# EAGLE board powerSupply (EAGLE 9.5.2)
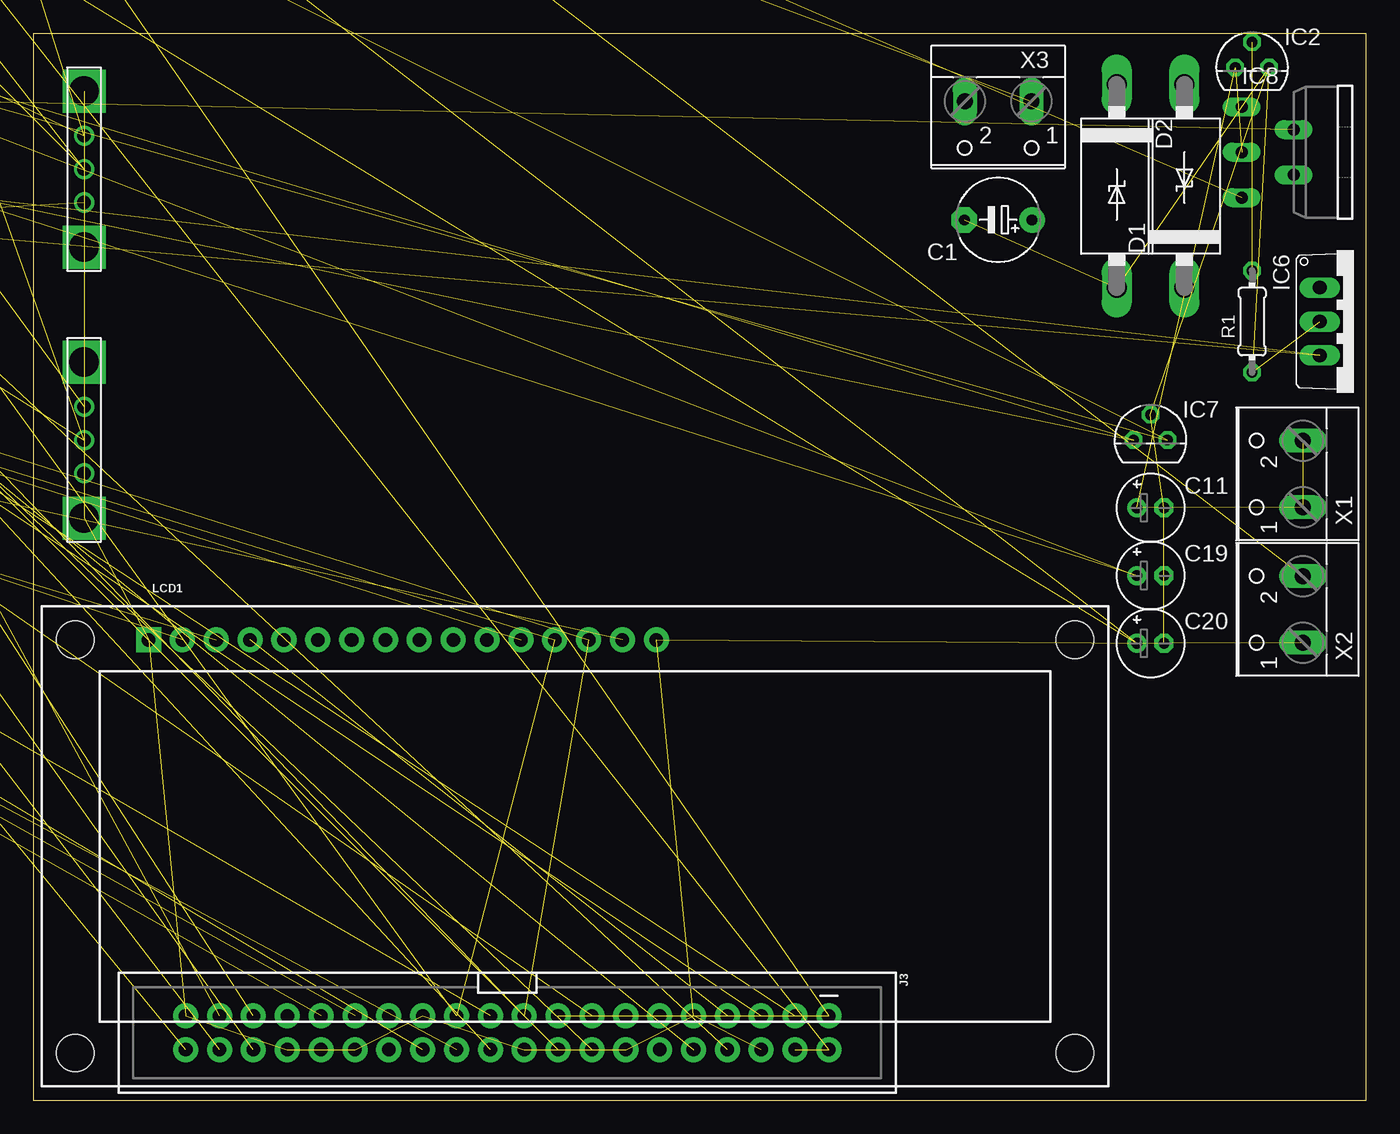
[diagram p0: board, top side]
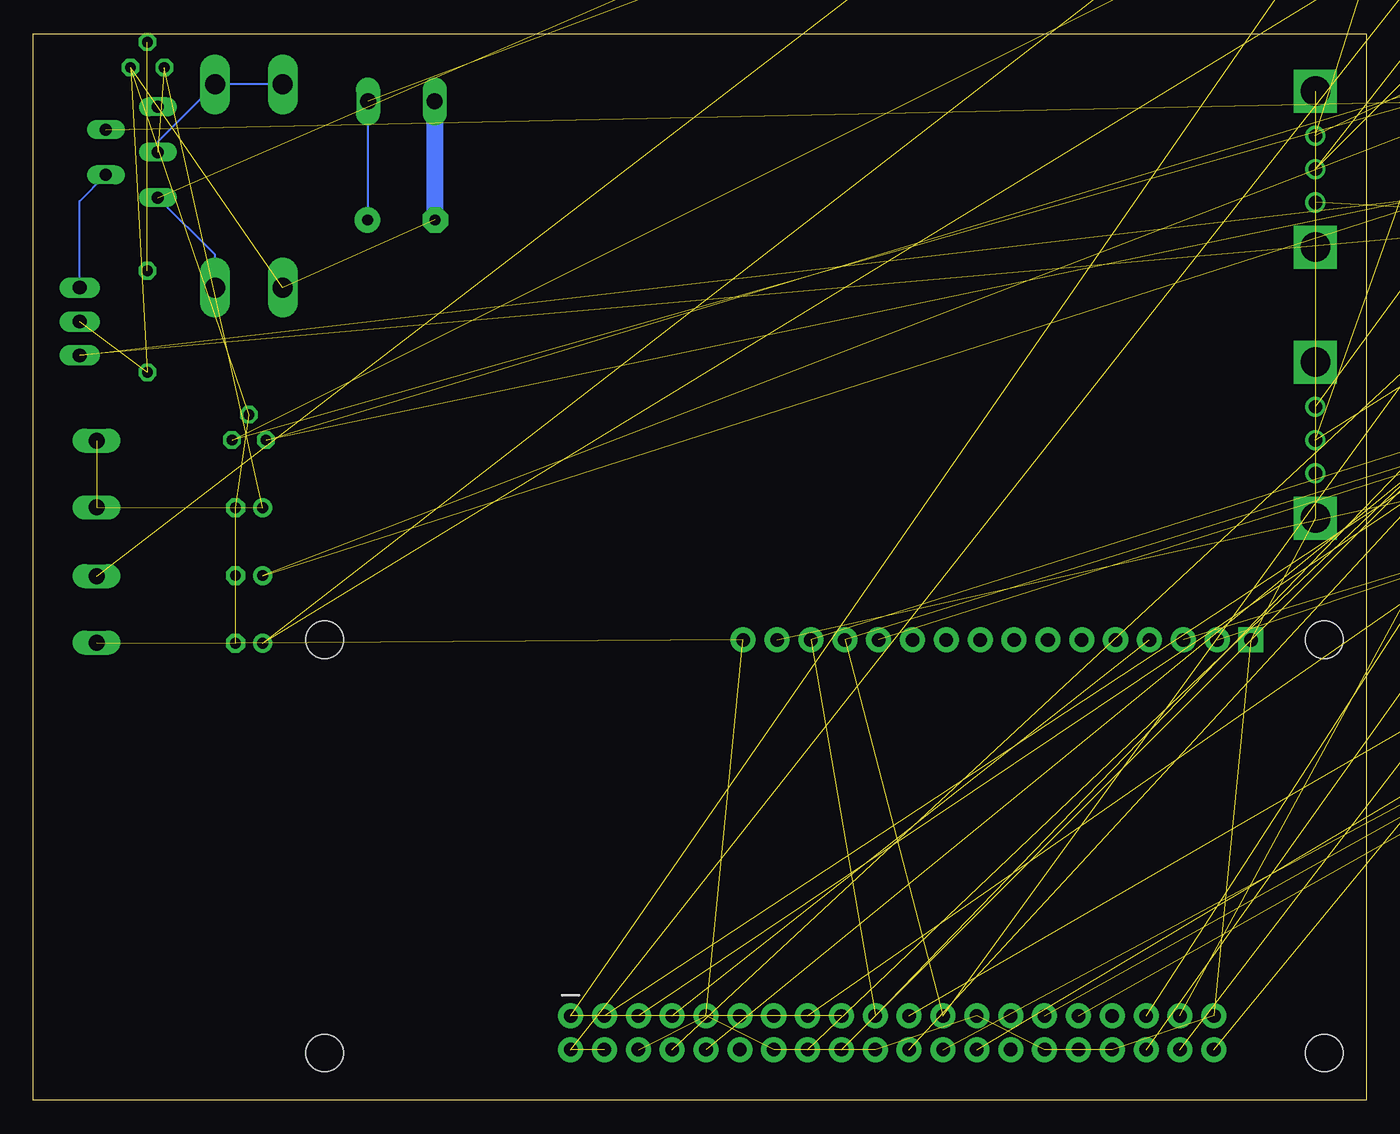
[diagram p1: board, bottom side, seen from below]

Size 100 x 80 mm. Coordinates in mm from the lower left corner, seen from the top.
Outline: 0,0 100,0 100,80 0,80 0,0
Copper layers (1*16): Top 0.035mm / dielectric 1.5mm / Bottom 0.035mm
Design rules "default": minimum track width 6mil, minimum drill 0.35mm, track to track 6mil, track to pad 6mil, pad to pad 6mil, via to via 6mil, smd to smd 6mil, copper to edge 40mil, drill to drill 6mil, minimum pad ring 10mil, minimum via ring 8mil, stop-mask expansion 4mil, vias tented up to drill 0mil, thermal gap 10mil

## Footprints (pad centres in the part's own frame; a part is rotated, then mirrored left to right if it is on the bottom)
E5-6 = drill 0.813 pad 1.905: + -2.54,0 | drill 0.813 pad 1.905 octagon: - 2.54,0
C050-024X044 = drill 0.813 octagon: 1 -2.54,0; 2 2.54,0
E2-5 = drill 0.813 pad 1.422: + -1.016,0 | drill 0.813 pad 1.422 octagon: - 1.016,0
C4111-15 = drill 1.499 long: A 7.62,0; C -7.62,0
DIL16 = drill 0.813 long: 1 -8.89,-3.81; 2 -6.35,-3.81; 3 -3.81,-3.81; 4 -1.27,-3.81; 5 1.27,-3.81; 6 3.81,-3.81; 7 6.35,-3.81; 8 8.89,-3.81; 9 8.89,3.81; 10 6.35,3.81; 11 3.81,3.81; 12 1.27,3.81; 13 -1.27,3.81; 14 -3.81,3.81; 15 -6.35,3.81; 16 -8.89,3.81
TO92 = drill 0.813 octagon: 1 -1.27,0; 2 0,1.905; 3 1.27,0
DIP08 = drill 0.813 pad 1.626 square: 1 -3.81,-3.81 | drill 0.813 pad 1.626: 2 -1.27,-3.81; 3 1.27,-3.81; 4 3.81,-3.81; 5 3.81,3.81; 6 1.27,3.81; 7 -1.27,3.81; 8 -3.81,3.81
SO16 = smd 0.66 x 2.032: 1 -4.445,-3.073; 2 -3.175,-3.073; 3 -1.905,-3.073; 4 -0.635,-3.073; 5 0.635,-3.073; 6 1.905,-3.073; 7 3.175,-3.073; 8 4.445,-3.073; 9 4.445,3.073; 10 3.175,3.073; 11 1.905,3.073; 12 0.635,3.073; 13 -0.635,3.073; 14 -1.905,3.073; 15 -3.175,3.073; 16 -4.445,3.073
TO220V = drill 1.016 long: 1 -2.54,-2.54; 2 0,-2.54; 3 2.54,-2.54
TO220-5 = drill 0.9 long: 1 -3.4,-8.4; 2 -1.7,-4.5; 3 0,-8.4; 4 1.7,-4.5; 5 3.4,-8.4
DIP08' = drill 0.813 pad 1.626: 1 -3.81,-3.81; 2 -1.27,-3.81; 3 1.27,-3.81; 4 3.81,-3.81; 5 3.81,3.81; 6 1.27,3.81; 7 -1.27,3.81; 8 -3.81,3.81
SOT23-8 = smd 0.4 x 1.2: 1 -0.975,-1.3; 2 -0.325,-1.3; 3 0.325,-1.3; 4 0.975,-1.3; 5 0.975,1.3; 6 0.325,1.3; 7 -0.325,1.3; 8 -0.975,1.3
2X20_SHROUDED = drill 1.016 pad 1.88: 1 -1.27,24.13; 2 1.27,24.13; 3 -1.27,21.59; 4 1.27,21.59; 5 -1.27,19.05; 6 1.27,19.05; 7 -1.27,16.51; 8 1.27,16.51; 9 -1.27,13.97; 10 1.27,13.97; 11 -1.27,11.43; 12 1.27,11.43; 13 -1.27,8.89; 14 1.27,8.89; 15 -1.27,6.35; 16 1.27,6.35; 17 -1.27,3.81; 18 1.27,3.81; 19 -1.27,1.27; 20 1.27,1.27; 21 -1.27,-1.27; 22 1.27,-1.27; 23 -1.27,-3.81; 24 1.27,-3.81; 25 -1.27,-6.35; 26 1.27,-6.35; 27 -1.27,-8.89; 28 1.27,-8.89; 29 -1.27,-11.43; 30 1.27,-11.43; 31 -1.27,-13.97; 32 1.27,-13.97; 33 -1.27,-16.51; 34 1.27,-16.51; 35 -1.27,-19.05; 36 1.27,-19.05; 37 -1.27,-21.59; 38 1.27,-21.59; 39 -1.27,-24.13; 40 1.27,-24.13
1X03 = drill 1.016: 1 -2.54,0; 2 0,0; 3 2.54,0
1X05 = drill 1.016 long: 1 -5.08,0; 2 -2.54,0; 3 0,0; 4 2.54,0; 5 5.08,0
LCD-16X2 = drill 1.016 pad 1.88 square: 1 -32,15.5 | drill 1.016 pad 1.88: 2 -29.46,15.5; 3 -26.92,15.5; 4 -24.38,15.5; 5 -21.84,15.5; 6 -19.3,15.5; 7 -16.76,15.5; 8 -14.22,15.5; 9 -11.68,15.5; 10 -9.14,15.5; 11 -6.6,15.5; 12 -4.06,15.5; 13 -1.52,15.5; 14 1.02,15.5; 15 3.56,15.5; 16 6.1,15.5 | hole 2.8: -37.5,15.5; -37.5,-15.5; 37.5,15.5; 37.5,-15.5
0204/7 = drill 0.813 octagon: 1 -3.81,0; 2 3.81,0
0207/12 = drill 0.813 pad 1.676 octagon: 1 -6.35,0; 2 6.35,0
RTRIM64W = drill 0.61: 1 1.27,-2.54; 2 1.27,0; 3 1.27,2.54
APLS_EC11B_SW = drill 2.2 square: GND@4 5.85,0; GND@5 -5.85,0 | drill 1: P$1 0,0; P$2 2.5,0; P$3 -2.5,0
B3F-1000 = drill 1 pad 1.6: 1 -3.25,2.25; 2 3.25,2.25; 3 -3.25,-2.25; 4 3.25,-2.25
TO92' = drill 0.813 octagon: 1 1.27,0; 2 0,1.905; 3 -1.27,0
W237-102 = drill 1.194 long: 1 -2.5,-1.27; 2 2.5,-1.27

## Placement (x,y rotation side)
C1  220u 25V  [E5-6]  72.39,66.04 180 top
C2  100n  [C050-024X044]  -72.39,88.9 0 top  (outside the outline)
C3  100n  [C050-024X044]  -80.01,88.9 0 top  (outside the outline)
C4  100n  [C050-024X044]  -87.63,88.9 0 top  (outside the outline)
C5  2u2  [E2-5]  -36.83,102.87 0 top  (outside the outline)
C6  2u2  [E2-5]  -45.72,102.87 0 top  (outside the outline)
C7  100n  [C050-024X044]  -95.25,88.9 0 top  (outside the outline)
C8  100n  [C050-024X044]  -102.87,88.9 0 top  (outside the outline)
C9  100n  [C050-024X044]  -110.49,88.9 0 top  (outside the outline)
C10  100n  [C050-024X044]  -16.51,96.52 0 top  (outside the outline)
C11  2u2  [E2-5]  83.82,44.45 0 top
C12  100n  [C050-024X044]  -24.13,96.52 0 top  (outside the outline)
C13  100n  [C050-024X044]  -31.75,96.52 0 top  (outside the outline)
C14  10n  [C050-024X044]  -39.37,96.52 0 top  (outside the outline)
C15  10n  [C050-024X044]  -46.99,96.52 0 top  (outside the outline)
C16  10n  [C050-024X044]  -54.61,96.52 0 top  (outside the outline)
C17  10n  [C050-024X044]  -62.23,96.52 0 top  (outside the outline)
C18  2u2  [E2-5]  -102.87,95.25 0 top  (outside the outline)
C19  2u2  [E2-5]  83.82,39.37 0 top
C20  2u2  [E2-5]  83.82,34.29 0 top
C21  100n  [C050-024X044]  -69.85,96.52 0 top  (outside the outline)
C22  100n  [C050-024X044]  -77.47,96.52 0 top  (outside the outline)
C23  100n  [C050-024X044]  -85.09,96.52 0 top  (outside the outline)
C24  100n  [C050-024X044]  -92.71,96.52 0 top  (outside the outline)
D1  1N5821  [C4111-15]  86.36,68.58 90 top
D2  1N5821  [C4111-15]  81.28,68.58 270 top
IC1  MCP3008  [DIL16]  -81.28,68.58 0 top  (outside the outline)
IC2  LM334Z  [TO92]  91.44,77.47 0 top
IC3  MCP4821P  [DIP08]  -20.32,80.01 0 top  (outside the outline)
IC4  MCP4821P  [DIP08]  -34.29,80.01 0 top  (outside the outline)
IC5  74LS139D  [SO16]  -100.33,80.01 0 top  (outside the outline)
IC6  7805TV  [TO220V]  99.06,58.42 270 top
IC7  LP2950Z  [TO92]  83.82,49.53 0 top
IC8  LT3080T  [TO220-5]  99.06,71.12 270 top
IC9  LM358  [DIP08']  -48.26,80.01 0 top  (outside the outline)
IC11  [SOT23-8]  -109.22,114.3 0 top  (outside the outline)
IC12  LM358  [DIP08']  -62.23,80.01 0 top  (outside the outline)
J3  RASPBERRYPI-40-PIN-GPIO_PTH  [2X20_SHROUDED]  35.56,5.08 270 top
JP1  [1X03]  -95.25,101.6 0 top  (outside the outline)
JP2  [1X05]  -55.88,101.6 0 top  (outside the outline)
LCD1  LCD-16X2SILK  [LCD-16X2]  40.64,19.05 0 top
R1  100R  [0204/7]  91.44,58.42 90 top
R2  10R  [0207/12]  -33.02,107.95 0 top  (outside the outline)
R3  10R  [0207/12]  -48.26,107.95 0 top  (outside the outline)
R4  10R  [0207/12]  -63.5,107.95 0 top  (outside the outline)
R5  10R  [0207/12]  -78.74,107.95 0 top  (outside the outline)
R6  10R  [0207/12]  -93.98,107.95 0 top  (outside the outline)
R7  10R  [0207/12]  -109.22,107.95 0 top  (outside the outline)
R8  10R  [0207/12]  -20.32,113.03 0 top  (outside the outline)
R9  10R  [0207/12]  -35.56,113.03 0 top  (outside the outline)
R10  10R  [0207/12]  -50.8,113.03 0 top  (outside the outline)
R11  10R  [0207/12]  -66.04,113.03 0 top  (outside the outline)
R12  18K 0.1%  [0204/7]  -44.45,118.11 0 top  (outside the outline)
R13  18K 0.1%  [0204/7]  -54.61,118.11 0 top  (outside the outline)
R14  18K 0.1%  [0204/7]  -64.77,118.11 0 top  (outside the outline)
R15  18K 0.1%  [0204/7]  -74.93,118.11 0 top  (outside the outline)
R16  1K  [0204/7]  -38.1,123.19 0 top  (outside the outline)
R17  1K  [0204/7]  -48.26,123.19 0 top  (outside the outline)
R18  1K 0.1%  [0204/7]  -58.42,123.19 0 top  (outside the outline)
R19  18K 0.1%  [0204/7]  -85.09,118.11 0 top  (outside the outline)
R20  18K 0.1%  [0204/7]  -95.25,118.11 0 top  (outside the outline)
R21  100R  [0204/7]  -68.58,123.19 0 top  (outside the outline)
R22  10K  [0204/7]  -78.74,123.19 0 top  (outside the outline)
R23  10R  [0207/12]  -81.28,113.03 0 top  (outside the outline)
R25  1K 0.1%  [0204/7]  -88.9,123.19 0 top  (outside the outline)
R26  18K 0.1%  [0204/7]  -105.41,118.11 0 top  (outside the outline)
R27  18K 0.1%  [0204/7]  -17.78,123.19 0 top  (outside the outline)
R28  10K  [0204/7]  -99.06,123.19 0 top  (outside the outline)
R29  10K  [0204/7]  -109.22,123.19 0 top  (outside the outline)
R30  10K  [0204/7]  -17.78,128.27 0 top  (outside the outline)
R31  10K  [0204/7]  -27.94,128.27 0 top  (outside the outline)
R32  10R  [0207/12]  -96.52,113.03 0 top  (outside the outline)
R33  10K  [RTRIM64W]  -99.06,68.58 0 top  (outside the outline)
R34  10K  [0204/7]  -38.1,128.27 0 top  (outside the outline)
R35  10K  [0204/7]  -48.26,128.27 0 top  (outside the outline)
R36  10K  [0204/7]  -58.42,128.27 0 top  (outside the outline)
R37  10K  [0204/7]  -68.58,128.27 0 top  (outside the outline)
R38  10K  [0204/7]  -78.74,128.27 0 top  (outside the outline)
R39  10K  [0204/7]  -88.9,128.27 0 top  (outside the outline)
R40  1K  [0204/7]  -99.06,128.27 0 top  (outside the outline)
R41  1M  [RTRIM64W]  -109.22,68.58 0 top  (outside the outline)
R42  2M  [0204/7]  -109.22,128.27 0 top  (outside the outline)
R43  4M  [0204/7]  -17.78,133.35 0 top  (outside the outline)
R44  Don't populate  [0204/7]  -21.59,118.11 0 top  (outside the outline)
R45  Don't populate  [0204/7]  -34.29,118.11 0 top  (outside the outline)
SW1  EC11B_SW  [APLS_EC11B_SW]  3.81,49.53 90 top
SW2  EC11B_SW  [APLS_EC11B_SW]  3.81,69.85 90 top
SW7  B3F-1000  [B3F-1000]  -17.78,68.58 0 top  (outside the outline)
T1  2N3904  [TO92']  -110.49,101.6 0 top  (outside the outline)
T3  2N3904  [TO92']  -22.86,107.95 0 top  (outside the outline)
U1  MAX874CPA  [DIP08]  -76.2,80.01 0 top  (outside the outline)
X1  VOUT  [W237-102]  93.98,46.99 90 top
X2  VSENSE  [W237-102]  93.98,36.83 90 top
X3  VIN  [W237-102]  72.39,73.66 180 top

## Library data of the parts
C1 = rcl; SPICEPREFIX: C
C2-C24 IC1 JP1 R2-R11 R23 R32 = adafruit
D1 D2 = diode
IC2 IC6 IC7 = linear
IC3 IC4 = mixedSignal
IC5 = 74xx-us
IC8 = LinearRegulators
IC9 IC12 = SparkFun-IC-Amplifiers; PROD_ID: IC-09172
IC11 U1 = Hexellence-mixedSignal
J3 = Hexellence-Connectors; PROD_ID: CONN-12263; SF_ID: PRT-13054
JP2 = pinhead
LCD1 = Hexellence-Displays; PROD_ID: LCD-12633; SF_ID: LCD-00255
R1 R12-R22 R25-R31 R34-R40 R42-R45 = rcl; SPICEPREFIX: R
R33 R41 = resistor
SW1 SW2 = Hexellence-Switch
SW7 = Switch; CREATED_BY: PCBLayout.com; DIGI_KEY_PART_NUMBER: SW400-ND; MANUFACTURER: Omron Electronics Inc-EMC Div; MPN: B3F-1000; PACKAGE: SPST-NO
T1 T3 = transistor
X1-X3 = con-wago-500; MPN: 237-102; OC_FARNELL: unknown; OC_NEWARK: 70K9898

## Nets
0.064V@25C: IC2.2 R1.2
3.3V: C8.1 C9.1 C10.1 C20.+ C21.1 IC1.3 IC3.1 IC3.6 IC4.1 IC4.6 IC7.1 R44.1
4.096V: IC1.15 R42.1 U1.6
5V: C2.1 C12.1 C19.+ C22.1 C24.1 IC1.16 IC6.3 IC7.3 IC11.4 R30.1 R31.1 R36.1 R37.1 R39.2 R45.1 T3.1 U1.2
A0: IC5.2 IC5.14 J3.31
A1: IC5.3 IC5.13 J3.29
ADC_CS: IC1.10 IC5.4
ADC_IOUT: C6.+ IC1.4 IC12.5 R16.2
CS4: IC5.9
CS5: IC5.10
CS6: IC5.11
CS7: IC5.12
GND: C1.- C2.2 C3.2 C4.2 C5.- C6.- C7.2 C8.2 C9.2 C10.2 C11.- C12.2 C13.2 C14.2 C15.2 C16.2 C17.2 C18.- C19.- C20.- C21.2 C22.2 C23.2 C24.2 D2.A IC1.9 IC1.14 IC2.3 IC3.5 IC3.7 IC4.5 IC4.7 IC5.8 IC6.2 IC7.2 IC9.4 IC11.3 IC11.7 IC11.8 IC12.4 J3.6 J3.9 J3.14 J3.20 J3.25 J3.30 J3.34 J3.39 JP1.3 JP2.5 LCD1.1 LCD1.16 R1.1 R14.1 R18.1 R25.1 R38.1 R43.1 SW1.GND@4 SW1.GND@5 SW1.P$3 SW2.GND@4 SW2.GND@5 SW2.P$3 SW7.4 T1.3 U1.4 X2.1 X3.2
IDAC_CS: IC3.2 IC5.6
LCD_CS: IC5.7 LCD1.12
MISO: IC1.12 J3.21
MOSI: IC1.11 IC3.4 IC4.4 J3.19 LCD1.14
N$1: IC3.8 IC12.6
N$2: IC1.2 R38.2 R39.1
N$3: LCD1.3 R33.2
N$4: IC11.1 R23.1
N$5: IC1.8 U1.3
N$6: IC9.1 IC9.2 R13.1
N$7: IC9.6 R12.1 R13.2
N$8: R17.2 R21.1 T1.1
N$9: IC9.5 R14.2 R15.2
N$10: C4.1 IC12.8
N$11: IC9.7 R12.2 R16.1
N$12: R22.2 T1.2
N$13: IC12.2 R18.2 R19.1 R20.1
N$14: IC12.7 JP1.1
N$18: LCD1.15 R33.1
N$19: IC11.2 R32.1
N$20: J3.15 JP1.2 R22.1
N$21: J3.7 LCD1.4
N$22: R28.1 R30.2 SW2.P$2
N$23: C14.1 J3.35 R28.2
N$24: C15.1 J3.36 R34.2
N$25: R34.1 R36.2 SW2.P$1
N$26: C16.1 J3.38 R29.2
N$27: C17.1 J3.40 R35.2
N$28: R29.1 R31.2 SW1.P$1
N$29: R35.1 R37.2 SW1.P$2
N$30: J3.16 JP2.1
N$31: J3.18 JP2.2
N$32: J3.22 JP2.3
N$33: J3.8 JP2.4
N$34: IC11.6 J3.3
N$35: IC11.5 J3.5
N$36: J3.37 SW7.1
N$37: R40.2 T3.2
N$38: C13.1 LCD1.2 R33.3 T3.3
N$39: J3.10 R40.1
N$40: R41.2 U1.5
N$41: R41.3 R42.2
N$42: J3.1 J3.17 R44.2
N$43: R41.1 R43.2
N$44: J3.2 J3.4 R45.2
OE0: IC5.1 J3.24
OE1: IC5.15 J3.26
S$1: IC6.1 IC8.4
SCLK: IC1.13 IC3.3 IC4.3 J3.23 LCD1.13
V+: C1.+ C18.+ C23.1 R2.1 R3.1 R4.1 R5.1 R6.1 R7.1 R8.1 R9.1 R10.1 R11.1 R15.1 R23.2 X3.1
VADJ: C5.+ IC8.2 IC12.1 R17.1 R19.2 R20.2 R21.2
VCC: IC5.16
VDAC_CS: IC4.2 IC5.5
VOUT: C11.+ D1.A D2.C IC2.1 IC8.3 X1.1 X1.2
VOUT_ADC: C7.1 IC1.1 R25.2 R26.1 R27.1
VR: C3.1 D1.C IC8.5 IC9.3 IC9.8 R2.2 R3.2 R4.2 R5.2 R6.2 R7.2 R8.2 R9.2 R10.2 R11.2 R32.2
VSENS: R26.2 R27.2 X2.2
VSET: IC4.8 IC12.3

## Tracks (layer width: path | path; a pad name or v marks a point on that pad's centre or on a via)
0.064V@25C  (1 unrouted)
3.3V  (11 unrouted)
4.096V  (2 unrouted)
5V  (16 unrouted)
A0  (2 unrouted)
A1  (2 unrouted)
ADC_CS  (1 unrouted)
ADC_IOUT  (3 unrouted)
GND  (67 unrouted)
  Bottom 0.152: 69.89,66.08 C1.- | X3.2 69.89,74.97
  Bottom 1.27: X3.2 69.89,66.08
IDAC_CS  (1 unrouted)
LCD_CS  (1 unrouted)
MISO  (1 unrouted)
MOSI  (4 unrouted)
N$1  (1 unrouted)
N$2  (2 unrouted)
N$3  (1 unrouted)
N$4  (1 unrouted)
N$5  (1 unrouted)
N$6  (2 unrouted)
N$7  (2 unrouted)
N$8  (2 unrouted)
N$9  (2 unrouted)
N$10  (1 unrouted)
N$11  (2 unrouted)
N$12  (1 unrouted)
N$13  (3 unrouted)
N$14  (1 unrouted)
N$18  (1 unrouted)
N$19  (1 unrouted)
N$20  (2 unrouted)
N$21  (1 unrouted)
N$22  (2 unrouted)
N$23  (2 unrouted)
N$24  (2 unrouted)
N$25  (2 unrouted)
N$26  (2 unrouted)
N$27  (2 unrouted)
N$28  (2 unrouted)
N$29  (2 unrouted)
N$30  (1 unrouted)
N$31  (1 unrouted)
N$32  (1 unrouted)
N$33  (1 unrouted)
N$34  (1 unrouted)
N$35  (1 unrouted)
N$36  (1 unrouted)
N$37  (1 unrouted)
N$38  (3 unrouted)
N$39  (1 unrouted)
N$40  (1 unrouted)
N$41  (1 unrouted)
N$42  (2 unrouted)
N$43  (1 unrouted)
N$44  (2 unrouted)
OE0  (1 unrouted)
OE1  (1 unrouted)
S$1
  Bottom 0.152: IC6.1 96.52,67.46 IC8.4
SCLK  (4 unrouted)
V+  (14 unrouted)
  Bottom 0.152: X3.1 74.93,74.89 C1.+
VADJ  (6 unrouted)
VDAC_CS  (1 unrouted)
VOUT  (4 unrouted)
  Bottom 0.152: D2.C D1.A 90.66,71.9 IC8.3
VOUT_ADC  (4 unrouted)
VR  (14 unrouted)
  Bottom 0.152: D1.C 86.36,63.42 IC8.5
VSENS  (2 unrouted)
VSET  (1 unrouted)